# Altium PCB diban_v2.0.PcbDoc
Units mil, origin at the board's own origin, x right, y up, seen from the top; angles counter-clockwise.
Board outline 2755.91 x 2755.91 mil, 2 copper layers (Top Layer, Bottom Layer), stack 21.6 mil thick; 176 components, 148 nets, 694 pads, 0 vias.
Unrouted connection lines stored in the file: 446.
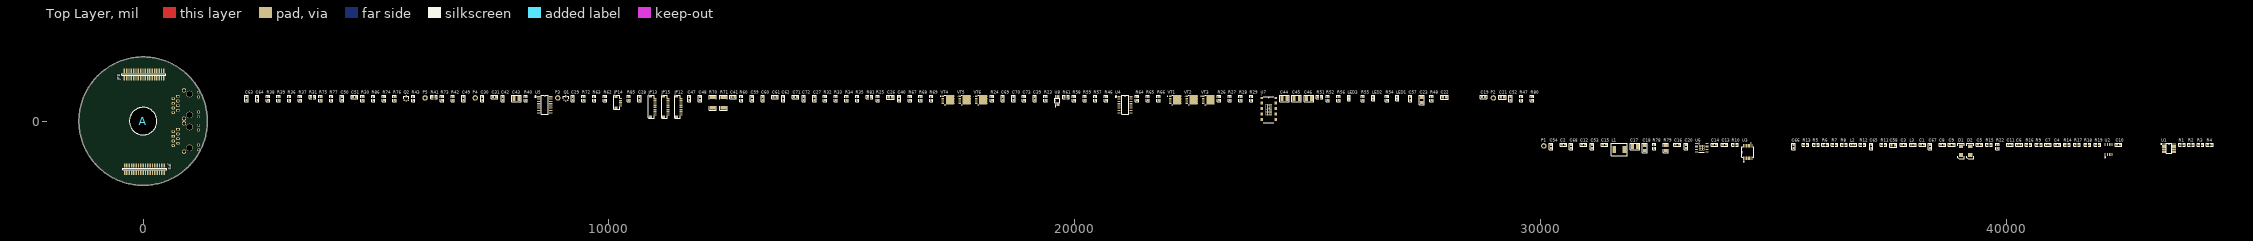
[diagram p0: Top Layer view]
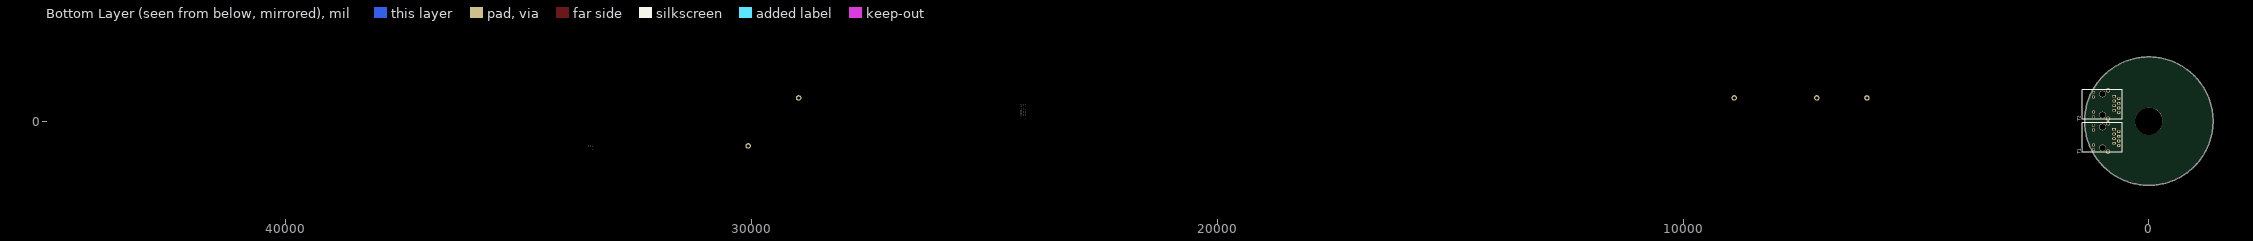
[diagram p1: Bottom Layer view, seen from below]

## Layer stack, top to bottom
Top Solder: solder mask 0.4, Solder Resist, Dk 3.5
Top Layer: signal copper 2.35
Dielectric 1: core 16.9, FR-4, Dk 4.2
Bottom Layer: signal copper 2.35
Bottom Solder: solder mask 0.4, Solder Resist, Dk 3.5

## Board outline
-1377.95,0 ccw(c0,0) 0,-1377.95 ccw(c0,0) 1377.95,0 ccw(c0,0) 0,1377.95 ccw(c0,0)

## Design rules (kind name [scope] priority, off if disabled: settings)
Clearance [All] p1: gap=5
ComponentClearance [All] p1: gap=0 collisioncheckmode=3 verticalgap=10 showdistances=FALSE
DiffPairsRouting [All] p1: maxlimit=10 minlimit=10 mostfreqgap=10 toplayer_minwidth=15 toplayer_maxwidth=15 toplayer_prefwidth=15 bottomlayer_minwidth=15 bottomlayer_maxwidth=15 bottomlayer_prefwidth=15 maxuncoupledlength=500
HoleSize [All] p1: absolutevalues=TRUE maxlimit=600 minlimit=1 maxpercent=80.000 minpercent=20.000
HoleToHoleClearance [All] p1: gap=5 allowstackedmicrovias=TRUE
MinimumSolderMaskSliver [All] p1: minsoldermaskwidth=0
PlaneClearance [All] p1: clearance=10
PlaneConnect [All] p1: planeconnectstyle=Relief reliefexpansion=12 reliefentries=4 reliefconductorwidth=15 reliefairgap=10
PolygonConnect [All] p1: connectstyle=Relief reliefconductorwidth=10 reliefentries=4 polygonreliefangle="90 Angle" airgapwidth=10
RoutingVias [All] p1: holewidth=10 width=20 viastyle="Through Hole" minholewidth=10 minwidth=20 maxholewidth=28 maxwidth=50
SilkToSilkClearance [All] p1: silktosilkclearance=0
SilkToSolderMaskClearance [IsPad] p1: minsilkscreentomaskgap=0 clearancetoexposedcopper=TRUE
SolderMaskExpansion [All] p1: expansion=4
Width [All] p1: maxlimit=50 minlimit=5 preferedwidth=10
21 further rules are at their usual default settings.

## Classes and differential pairs
differential pair RXA: +RXA_P -RXA_N
differential pair RXB: +RXB_P -RXB_N
differential pair TXA: +TXA_P -TXA_N
differential pair TXB: +TXB_P -TXB_N

## Components (designator, comment, footprint, x,y, rotation, side; value= is the part's Value field where it differs from the comment)
A "circle" Circle 0,0 r90 top
C1 "0603B223J6R3NT" CC1608-0603 38199,-508 r0 top
C2 "0603B223J6R3NT" CC1608-0603 30491,-508 r0 top
C3 "0603B103J6R3NT" CC1608-0603 37796,-508 r0 top
C4 "0603B150J6R3NT" CC1608-0603 41100,-508 r0 top
C5 "0603B150J6R3NT" CC1608-0603 39427,-508 r0 top
C6 "0603B150J6R3NT" CC1608-0603 40278,-508 r0 top
C7 "0603B104J6R3NT" CC1608-0603 40899,-508 r0 top
C8 "0603B104J6R3NT" CC1608-0603 38630,-508 r0 top
C9 "0603B104J6R3NT" CC1608-0603 38830,-508 r0 top
C10 "0603B104J6R3NT" CC1608-0603 42413,-508 r0 top
C11 "0603B104J6R3NT" CC1608-0603 40078,-508 r0 top
C12 "0603B104J6R3NT" CC1608-0603 30922,-508 r0 top
C13 "0603B104J6R3NT" CC1608-0603 33954,-508 r0 top
C14 "0603B104J6R3NT" CC1608-0603 33734,-508 r0 top
C15 "0603B104J6R3NT" CC1608-0603 31372,-508 r0 top
C16 "0603B104J6R3NT" CC1608-0603 32938,-508 r0 top
C17 "C3225X7S2A475M200AB" CC3225-1210 32028,-541 r0 top
C18 "C3216X5R2A105K" CC3216-1206 32239,-574 r90 top
C19 "0603B225J6R3NT" CC1608-0603 28781,521 r0 top
C20 "0603B474J6R3NT" CC1608-0603 33123,-544 r90 top
C21 "CL21C360JBANNNC" CC2012-0805 29186,511 r0 top
C22 "GRM21BR61E475KA12L" CC2012-0805 27937,511 r0 top
C23 "GRM31CR61A476KE15L" CC3216-1206 27450,455 r90 top
C26 "0603B225J6R3NT" CC2012-0805 16045,511 r0 top
C27 "0603B223J500NT" CC1608-0603 14412,485 r90 top
C28 "0603B105J250NT" CC1608-0603 10655,485 r90 top
C29 "0603B105J250NT" CC1608-0603 9225,485 r90 top
C30 "0603B222J6R3NT" CC1608-0603 7282,485 r90 top
C31 "0603B222J6R3NT" CC1608-0603 7547,521 r0 top
C39 "0603B104J500NT" CC1608-0603 19144,485 r90 top
C40 "0603B104J500NT" CC1608-0603 16232,485 r90 top
C41 "0603B104J500NT" CC1608-0603 12667,521 r0 top
C42 "0603B104J101NT" CC1608-0603 7722,485 r90 top
C43 "GRM32ER72A225KA35L" CC3225-1210 8019,488 r0 top
C44 "GRM32ER72A225KA35L" CC3225-1210 24505,488 r0 top
C45 "GRM32ER72A225KA35L" CC3225-1210 24767,488 r0 top
C46 "GRM32ER72A225KA35L" CC3225-1210 25029,488 r0 top
C47 "0603B102J500NT" CC1608-0603 11726,485 r90 top
C48 "0603B102J500NT" CC1608-0603 11956,485 r90 top
C49 "0603B104J160NT" CC1608-0603 6876,485 r90 top
C50 "0603B104J160NT" CC1608-0603 4269,485 r90 top
C51 "0603B104J160NT" CC1608-0603 4534,521 r0 top
C52 "0603B104J160NT" CC1608-0603 29359,485 r90 top
C53 "0603B104J101NT" CC1608-0603 31107,-544 r90 top
C54 "0603B103J101NT" CC1608-0603 30226,-544 r90 top
C57 "0603B474J6R3NT" CC1608-0603 27204,485 r90 top
C58 "0805B106J100NT" CC2012-0805 37574,-518 r0 top
C59 "0603B104J6R3NT" CC1608-0603 13072,485 r90 top
C60 "0603B104J6R3NT" CC1608-0603 13302,485 r90 top
C61 "0603B104J6R3NT" CC1608-0603 13567,521 r0 top
C62 "0603B104J6R3NT" CC1608-0603 13742,485 r90 top
C63 "0603B104J6R3NT" CC1608-0603 2219,485 r90 top
C64 "0603B104J6R3NT" CC1608-0603 2449,485 r90 top
C65 "0402B104J6R3NT" CC1608-0603 37101,-544 r90 top
C66 "0402B104J6R3NT" CC1608-0603 35430,-544 r90 top
C67 "0603B223J6R3NT" CC1608-0603 38364,-544 r90 top
C68 "0603B223J6R3NT" CC1608-0603 30656,-544 r90 top
C69 "0603B331J6R3NT" CC1608-0603 18455,485 r90 top
C70 "0603B331J6R3NT" CC1608-0603 18685,485 r90 top
C71 "0603B331J6R3NT" CC1608-0603 14007,521 r0 top
C72 "0603B331J6R3NT" CC1608-0603 14182,485 r90 top
C73 "0603B104J6R3NT" CR1608-0603 18915,486 r90 top
D1 "Diode Schottky" TVS 39030,-732 r90 top
D2 "Diode Schottky" TVS 39228,-732 r90 top
JP8 "Header 18X2" DC_1.27_36 -404,920 r180 top
JP9 "Header 18X2" DC_1.27_36 452,-953 r0 top
JP12 "Header 10" SH1.0T-10A 11551,134 r90 top
JP13 "Header 10" SH1.0T-10A 10991,134 r90 top
JP14 "SH1.0T-5A" SH1.0T-5A 10250,326 r90 top
JP15 "Header 10" SH1.0T-10A 11271,134 r90 top
L1 "SPR6540-150M" SPR6540 31585,-610 r0 top
L2 "BLM18EG221SN1D" BLM0603 36714,-508 r0 top
L3 "BLM18EG221SN1D" BLM0603 37997,-508 r0 top
LED1 "LED Chip" 0603D 26928,468 r90 top
LED2 "LED Chip" 0603D 26409,468 r90 top
LED3 "LED Chip" 0603D 25889,468 r90 top
P1 "PAD" PAD 30073,-532 r0 top
P2 "PAD" PAD 28990,497 r0 top
P3 "PAD" PAD 8903,497 r0 top
P4 "PAD" PAD 7130,497 r0 top
P5 "PAD" PAD 6053,497 r0 top
Q1 "NPN" SOT-23 9036,449 r0 top
Q2 "NPN" SOT-23 5609,449 r0 top
R1 "RC03K49R9JT" CR1608-0603 43771,-508 r0 top
R2 "RC03K49R9JT" CR1608-0603 43971,-508 r0 top
R3 "RC03K49R9JT" CR1608-0603 44170,-508 r0 top
R4 "RC03K49R9JT" CR1608-0603 44370,-508 r0 top
R5 "RC03K49R9JT" CR1608-0603 35915,-508 r0 top
R6 "RC03K49R9JT" CR1608-0603 36115,-508 r0 top
R7 "RC03K49R9JT" CR1608-0603 36315,-508 r0 top
R8 "RC03K49R9JT" CR1608-0603 36514,-508 r0 top
R9 "RC03K331JT" CR1608-0603 40699,-508 r0 top
R10 "RC03K331JT" CR1608-0603 34174,-508 r0 top
R11 "RC03K101JT" CR1608-0603 37366,-508 r0 top
R12 "RC03K101JT" CR1608-0603 36916,-508 r0 top
R13 "RC03K101JT" CR1608-0603 35695,-508 r0 top
R14 "RC03K100JT" CR1608-0603 41301,-508 r0 top
R15 "RC03K100JT" CR1608-0603 39628,-508 r0 top
R16 "RC03K100JT" CR1608-0603 40479,-508 r0 top
R17 "RC03K492JT" CR1608-0603 41521,-508 r0 top
R18 "RC03K492JT" CR1608-0603 41741,-508 r0 top
R19 "RC03K492JT" CR1608-0603 41961,-508 r0 top
R22 "RC03K121JT" CR1608-0603 39812,-543 r90 top
R23 "RC03K492JT" CR1608-0603 19374,486 r90 top
R24 "RC03K492JT" CR1608-0603 18225,486 r90 top
R25 "RC03K492JT" CR1608-0603 15772,486 r90 top
R26 "RC03K492JT" CR1608-0603 23101,486 r90 top
R27 "RC03K492JT" CR1608-0603 23331,486 r90 top
R28 "RC03K492JT" CR1608-0603 23561,486 r90 top
R29 "RC03K492JT" CR1608-0603 23791,486 r90 top
R30 "RC03K492JT" CR1608-0603 4709,486 r90 top
R31 "RC03K492JT" CR1608-0603 3634,521 r0 top
R32 "RC03K501JT" CR1608-0603 14642,486 r90 top
R33 "RC03K501JT" CR1608-0603 14872,486 r90 top
R34 "RC03K501JT" CR1608-0603 15102,486 r90 top
R35 "RC03K501JT" CR1608-0603 15332,486 r90 top
R36 "RC03K501JT" CR1608-0603 3139,486 r90 top
R37 "RC03K501JT" CR1608-0603 3368,486 r90 top
R38 "RC03K492JT" CR1608-0603 2679,486 r90 top
R39 "RC03K492JT" CR1608-0603 2909,486 r90 top
R40 "RC03K492JT" CR1608-0603 8215,486 r90 top
R41 "RC03K492JT" CR1608-0603 6241,521 r0 top
R42 "RC03K492JT" CR1608-0603 6646,486 r90 top
R43 "RC03K492JT" CR1608-0603 5799,486 r90 top
R46 "RC03K492JT" CR1608-0603 20674,486 r90 top
R47 "RC03K105JT" CR1608-0603 29589,486 r90 top
R48 "RC03K2553JT" CR1608-0603 27664,486 r90 top
R51 "RC03K103JT" CR1608-0603 25260,521 r0 top
R52 "RC03K103JT" CR1608-0603 25435,486 r90 top
R54 "RC03K331JT" CR1608-0603 26705,486 r90 top
R55 "RC03K331JT" CR1608-0603 26185,486 r90 top
R56 "RC03K331JT" CR1608-0603 25665,486 r90 top
R57 "RC03K121JT" CR1608-0603 20444,486 r90 top
R58 "RC03K103JT" CR1608-0603 19985,486 r90 top
R59 "RC03K103JT" CR1608-0603 20215,486 r90 top
R60 "RC03K102JT" CR1608-0603 12842,486 r90 top
R61 "RC03K101JT" CR1608-0603 19810,521 r0 top
R62 "RC03K560JT" CR1608-0603 9915,486 r90 top
R63 "RC03K560JT" CR1608-0603 9685,486 r90 top
R64 "RC03K100JT" CR1608-0603 21338,486 r90 top
R65 "RC03K100JT" CR1608-0603 21568,486 r90 top
R66 "RC03K100JT" CR1608-0603 21798,486 r90 top
R67 "RC03K100JT" CR1608-0603 16462,486 r90 top
R68 "RC03K100JT" CR1608-0603 16692,486 r90 top
R69 "RC03K100JT" CR1608-0603 16922,486 r90 top
R70 "CRA2512-FZ-R010ELF" CR6332-2512 12229,395 r90 top
R71 "CRA2512-FZ-R010ELF" CR6332-2512 12459,395 r90 top
R72 "RC03K8452JT" CR1608-0603 9455,486 r90 top
R73 "RC03K4991JT" CR1608-0603 6416,486 r90 top
R74 "RC03K8452JT" CR1608-0603 5169,486 r90 top
R75 "RC03K4991JT" CR1608-0603 3809,486 r90 top
R76 "RC03K8452JT" CR1608-0603 5399,486 r90 top
R77 "RC03K4991JT" CR1608-0603 4039,486 r90 top
R78 "RC03K8452JT" CR1608-0603 32443,-543 r90 top
R79 "CRCW12063R30JNEA" CR3216-1206 32689,-575 r90 top
R80 "RC03K4991JT" CR1608-0603 29819,486 r90 top
R81 "RC03K103JT" CR1608-0603 15597,521 r0 top
R85 "RC03K501JT" CR1608-0603 10425,486 r90 top
R86 "RC03K501JT" CR1608-0603 4939,486 r90 top
T1 "HR911102_RJ45" RJ45 647,-326 r90 bottom
T2 "HR911102_RJ45" RJ45 646,382 r90 bottom
U1 "DS90LV032A" DS90LV032A 43386,-494 r0 top
U2 "TCAN322" TCAN332 42123,-716 r90 top
U3 "MAX3227E_DB_16" MAX3227E 34451,-664 r90 top
U4 "PS2805C-4" PS2805C_4 20953,524 r0 top
U5 "PS2805C-4" PS2805C_4 8494,524 r0 top
U6 "LM46002PWPR" IM46002 33461,-571 r0 top
U7 "DRV8301" DRV8301 24165,241 r0 top
U8 "SN65HVD73" SN65HVD73 19586,355 r0 top
VT1 "CSD18540" "CSD18540 - duplicate" 22156,457 r0 top
VT2 "CSD18540" "CSD18540 - duplicate" 22514,457 r0 top
VT3 "CSD18540" "CSD18540 - duplicate" 22871,457 r0 top
VT4 "CSD18540" "CSD18540 - duplicate" 17280,457 r0 top
VT5 "CSD18540" "CSD18540 - duplicate" 17638,457 r0 top
VT6 "CSD18540" "CSD18540 - duplicate" 17995,457 r0 top

## Footprints (in the part's own frame and the unit in brackets; to place one, negate y for a bottom-side part, rotate by r counter-clockwise, add the part's x,y. Pads: shape width x height; smd on the part's side, far side on the other; paste and mask are expansions set on the pad)
0603D [mil]
  rect 40x40 smd: 1(0,0) 2(60,0)
  silkscreen extent -30,-30 90,30
BLM0603 [mm]
  rect 1.1x1 smd: 1(-0.85,0) 2(0.85,0)
  silkscreen extent -1.8,-0.9 1.86,0.9
CC1608-0603 [mm]
  rect 1.1x1 smd: 1(-0.85,0) 2(0.85,0)
  silkscreen extent -1.8,-0.9 1.83,0.9
CC2012-0805 [mm]
  rect 1.3x1.5 smd: 1(-0.95,0) 2(0.95,0)
  silkscreen extent -2,-1.15 2.03,1.15
CC3216-1206 [mm]
  rect 1.6x1.8 smd: 1(-1.4,0) 2(1.4,0)
  silkscreen extent -2.6,-1.3 2.59,1.3
CC3225-1210 [mm]
  rect 1.6x2.7 smd: 1(-1.4,0) 2(1.4,0)
  silkscreen extent -2.6,-1.75 2.59,1.75
Circle [mm]
  round 15 hole 15: 0(0,0)
  silkscreen extent -7.5,-7.5 7.5,7.5
CR1608-0603 [mm]
  rect 1.1x1 smd: 1(-0.85,0) 2(0.85,0)
  silkscreen extent -1.8,-0.9 1.8,0.9
CR3216-1206 [mm]
  rect 1.6x1.8 smd: 1(-1.4,0) 2(1.4,0)
  silkscreen extent -2.6,-1.3 2.6,1.3
CR6332-2512 [mm]
  rect 1.8x3.2 smd: 1(-2.8,0) 2(2.8,0)
  silkscreen extent -4.1,-2 4.1,2
"CSD18540 - duplicate" [mm]
  rect 1.372x0.71 smd paste-0.673: 1(-2.77,-0.635) 1(-2.77,0.635) 1(-2.77,1.905) 4(-2.77,-1.905) 5(2.77,-1.905) 5(2.77,-0.635) 5(2.77,0.635) 5(2.77,1.905)
  rect 4.343x5.08 smd: 5(1.041,-0.025)
  silkscreen extent -4.17,-2.55 -1.25,2.55
DC_1.27_36 [mm]
  rect 0.74x2.4 smd: 1(0,0) 2(0,-4.013) 3(-1.27,0) 4(-1.27,-4.013) 5(-2.54,0) 6(-2.54,-4.013) 7(-3.81,0) 8(-3.81,-4.013) 9(-5.08,0) 10(-5.08,-4.013) 11(-6.35,0) 12(-6.35,-4.013) 13(-7.62,0) 14(-7.62,-4.013) 15(-8.89,0) 16(-8.89,-4.013) 17(-10.16,0) 18(-10.16,-4.013) 19(-11.43,0) 20(-11.43,-4.013) 21(-12.7,0) 22(-12.7,-4.013) 23(-13.97,0) 24(-13.97,-4.013) 25(-15.24,0) 26(-15.24,-4.013) 27(-16.51,0) 28(-16.51,-4.013) 29(-17.78,0) 30(-17.78,-4.013) 31(-19.05,0) 32(-19.05,-4.013) 33(-20.32,0) 34(-20.32,-4.013) 35(-21.59,0) 36(-21.59,-4.013)
  silkscreen extent -22.71,-2.41 1.27,-1.52
DRV8301 [mil]
  rect 54x12 smd: 1(-152.5,265.75) 2(-152.5,246.06) 3(-152.5,226.38) 4(-152.5,206.69) 5(-152.5,187.01) 6(-152.5,167.32) 7(-152.5,147.64) 8(-152.5,127.95) 9(-152.5,108.27) 10(-152.5,88.58) 11(-152.5,68.9) 12(-152.5,49.21) 13(-152.5,29.53) 14(-152.5,9.84) 15(-152.5,-9.84) 16(-152.5,-29.53) 17(-152.5,-49.21) 18(-152.5,-68.9) 19(-152.5,-88.58) 20(-152.5,-108.27) 21(-152.5,-127.95) 22(-152.5,-147.64) 23(-152.5,-167.32) 24(-152.5,-187.01) 25(-152.5,-206.69) 26(-152.5,-226.38) 27(-152.5,-246.06) 28(-152.5,-265.75) 29(152.5,-265.75) 30(152.5,-246.06) 31(152.5,-226.38) 32(152.5,-206.69) 33(152.5,-187.01) 34(152.5,-167.32) 35(152.5,-147.64) 36(152.5,-127.95) 37(152.5,-108.27) 38(152.5,-88.58) 39(152.5,-68.9) 40(152.5,-49.21) 41(152.5,-29.53) 42(152.5,-9.84) 43(152.5,9.84) 44(152.5,29.53) 45(152.5,49.21) 46(152.5,68.9) 47(152.5,88.58) 48(152.5,108.27) 49(152.5,127.95) 50(152.5,147.64) 51(152.5,167.32) 52(152.5,187.01) 53(152.5,206.69) 54(152.5,226.38) 55(152.5,246.06) 56(152.5,265.75)
  round 20 / inner round 60 / far side round 20 hole 10: 57(-46.5,-108.5) 57(-46.5,-77.5) 57(-46.5,-46.5) 57(-46.5,-15.5) 57(-46.5,15.5) 57(-46.5,46.5) 57(-46.5,77.5) 57(-46.5,108.5) 57(1,-109) 57(1,-78) 57(1,-47) 57(1,-16) 57(1,15) 57(1,46) 57(1,77) 57(1,108) 57(46.5,-108.5) 57(46.5,-77.5) 57(46.5,-46.5) 57(46.5,-15.5) 57(46.5,15.5) 57(46.5,46.5) 57(46.5,77.5) 57(46.5,108.5)
  rect 142.13x250 smd mask-124.5: 57(0,0)
  silkscreen extent -114,-278 114,278
DS90LV032A [mm]
  rect 2x0.5 smd: 1(0,0) 2(0,-0.65) 3(0,-1.3) 4(0,-1.95) 5(0,-2.6) 6(0,-3.25) 7(0,-3.9) 8(0,-4.55) 9(5.5,-4.55) 10(5.5,-3.9) 11(5.5,-3.25) 12(5.5,-2.6) 13(5.5,-1.95) 14(5.5,-1.3) 15(5.5,-0.65) 16(5.5,0)
  silkscreen extent -1.63,-5.11 4.17,0.56
IM46002 [mm]
  oval 1.65x0.35 smd paste-0.102 mask+0.051: 1(-2.875,2.275) 2(-2.875,1.625) 3(-2.875,0.975) 4(-2.875,0.325) 5(-2.875,-0.325) 6(-2.875,-0.975) 7(-2.875,-1.625) 8(-2.875,-2.275) 9(2.875,-2.275) 10(2.875,-1.625) 11(2.875,-0.975) 12(2.875,-0.325) 13(2.875,0.325) 14(2.875,0.975) 15(2.875,1.625) 16(2.875,2.275)
  round 0.4 / inner round 1.524 / far side round 0.4 hole 0.2 mask+0.051: 17(-1,-1) 17(-1,0) 17(-1,1) 17(0,-1) 17(0,0) 17(0,1) 17(1,-1) 17(1,0) 17(1,1)
  rect 3x3.1 smd paste-0.102 mask+0.051: 17(0,0)
  silkscreen extent -1.7,-2.55 1.5,2.47
MAX3227E [mil]
  rect 81x17 smd: 1(-135,89.57) 2(-135,63.98) 3(-135,38.39) 4(-135,12.8) 5(-135,-12.8) 6(-135,-38.39) 7(-135,-63.98) 8(-135,-89.57) 9(135,-89.57) 10(135,-63.98) 11(135,-38.39) 12(135,-12.8) 13(135,12.8) 14(135,38.39) 15(135,63.98) 16(135,89.57)
  silkscreen extent -213,-128 196,128
PAD [mm]
  round 3 hole 1.8: 1(0,0)
PS2805C_4 [mm]
  rect 1.8x0.6 smd: 1(0,0) 2(0,-1.27) 3(0,-2.54) 4(0,-3.81) 5(0,-5.08) 6(0,-6.25) 7(0,-7.52) 8(0,-8.79) 9(6.5,-8.79) 10(6.5,-7.52) 11(6.5,-6.25) 12(6.5,-5.08) 13(6.5,-3.81) 14(6.5,-2.54) 15(6.5,-1.27) 16(6.5,0)
  silkscreen extent -2.12,-9.58 5.18,0.79
RJ45 [mm]
  round 3.6 hole 3.4: 0(-6.335,8.89) 0(5.075,8.89)
  rect 1.524x2.032 hole 1.016: 1(3.81,2.54)
  oval 1.524x2.032 hole 1.016: 2(2.54,0) 3(1.27,2.54) 4(0,0) 5(-1.27,2.54) 6(-2.54,0) 7(-3.81,2.54) 8(-5.08,0)
  round 1.6 hole 1.2: 9(5.985,13.79) 10(3.445,13.79) 11(-4.725,13.79) 12(-7.265,13.79)
  round 2.286 hole 1.651: 13(-8.385,5.84) 14(7.105,5.84)
  silkscreen extent -8.64,-2 7.36,19.81
SH1.0T-5A [mm]
  rect 1.2x1.8 smd: 0(-1,2.525) 0(5,2.525)
  rect 0.6x1.55 smd: 1(0,0) 2(1,0) 3(2,0) 4(3,0) 5(4,0)
  silkscreen extent -1.85,0.43 5.87,3.58
SH1.0T-10A [mm]
  rect 1.2x1.8 smd: 0(-1,2.525) 0(10,2.525)
  rect 0.6x1.55 smd: 1(0,0) 2(1,0) 3(2,0) 4(3,0) 5(4,0) 6(5,0) 7(6,0) 8(7,0) 9(8,0) 10(9,0)
  silkscreen extent -1.7,0.38 10.74,3.58
SN65HVD73 [mm]
  rect 0.3x1.45 smd: 1(0,0) 2(0.5,0) 3(1,0) 4(1.5,0) 5(2,0) 6(2,4.4) 7(1.5,4.4) 8(1,4.4) 9(0.5,4.4) 10(0,4.4)
  silkscreen extent -0.48,-1.12 2.41,3.51
SOT-23 [mil]
  rect 28x36 smd: 1(0,0) 2(80,0)
  rect 28x45 smd: 3(40,85)
  silkscreen extent -18,-10 98,80
SPR6540 [mm]
  rect 2x3.6 smd: 1(0,0) 2(5.55,0)
  silkscreen extent -1.63,-3.5 7.16,3.5
TCAN332 [mm]
  rect 1.55x0.6 smd: 1(0,0) 2(0,-1.27) 3(0,-2.54) 4(0,-3.81) 5(5.4,-3.81) 6(5.4,-2.54) 7(5.4,-1.27) 8(5.4,0)
  silkscreen extent -1.78,-0.25 -1.27,0.25
TVS [mm]
  rect 2.16x2.26 smd: 1(0,0) 2(4.9,0)
  silkscreen extent -2.03,-1.78 6.6,1.78

## Part data
C1 C2 C3 C4 C5 C6 C7 C8 C9 C10 C11 C12 C13 C14 C15 C16 C17 C18 C19 C20 C21 C22 C23 C26 C27 C28 C29 C30 C31 C39 C40 C41 C42 C43 C44 C45 C46 C47 C48 C49 C50 C51 C52 C53 C54 C57 C58 C59 C60 C61 C62 C63 C64 C65 C66 C67 C68 C69 C70 C71 C72 C73: library part CAP
D1 D2: "Schottky Diode"
JP8 JP9: "Header,36-Pin, Dual row"
JP12 JP13 JP15: "Header, 10-Pin"
L1: library part "Inductor Chip", "Inductor"
L2 L3: library part "Inductor Iron", "Magnetic-Core Inductor"
LED1 LED2 LED3: "Typical Chip LED"
Q1 Q2: "NPN Bipolar Transistor"
R1 R2 R3 R4 R5 R6 R7 R8 R9 R10 R11 R12 R13 R14 R15 R16 R17 R18 R19 R22 R23 R24 R25 R26 R27 R28 R29 R30 R31 R32 R33 R34 R35 R36 R37 R38 R39 R40 R41 R42 R43 R46 R47 R48 R51 R52 R54 R55 R56 R57 R58 R59 R60 R61 R62 R63 R64 R65 R66 R67 R68 R69 R70 R71 R72 R73 R74 R75 R76 R77 R78 R79 R80 R81 R85 R86: library part Resistor
U3 U6: "Imported"
U4 U5: "Optoisolator"

## Nets (pads, with @x,y where several pads share a name; then routed paths per layer and width w, separated by ;. In a path a pad name is that pad's centre, name@x,y a point inside that pad or via, vN(x,y) a via of type N, cw(c..) or ccw(c..) an arc to the next point about the centre after c; other vN are vias at no path point)
3V3: C3.2 C8.2 C9.2 C14.2 C58.2 C73.1 JP8.1 JP8.3 JP8.5 L2.1 L3.1 R17.1 R18.1 R19.1 R26.2 R27.2 R28.2 R29.2 R38.1 R39.1 R40.2 R41.2 R51.2 R52.2 R58.1 R59.1 U1.4 U1.16 U2.3 U3.12 U3.15 U3.16 U7.24 U7.49 U8.10
5V0: C21.2 C22.2 C23.2 JP8.2 JP8.4 JP8.6 JP13.4 JP15.7 L1.2 R47.1 U6.5
48V: C17.1 C18.1 C42.2 C43.2 C44.1 C45.1 C46.1 C53.2 P1.1 R78.2 R79.2 U6.12 U6.13 U6.14 U7.29 VT1.5 VT2.5 VT3.5
232_RXD: JP14.5 U3.8
232_TXD: JP14.4 U3.13
/RE: JP9.28 R59.2 U8.2
BISSC_CLK: JP9.25 JP15.6 U8.4
BISSC_DIN: JP9.30 JP15.5 R58.2 U8.1
C+: C71.2 JP15.4 U8.6
C-: C72.2 JP15.3 U8.7
CAN_RX: C11.2 D2.2 JP14.2 R22.1 U2.6
CAN_TX: C10.1 D1.2 JP14.1 R22.2 U2.7
CANRX_MCU: JP8.9 U2.4
CANTX_MCU: C7.2 JP8.7 U2.1
CAP1: JP9.22 JP13.2 R18.2
CAP2: JP9.20 JP13.3 R17.2
CAP3: JP9.24 JP13.1 R19.2
CHIP_MODE0: JP8.25 R9.1
CHIP_MODE1: JP8.23 R10.1
D+: C69.2 JP15.1 R57.2 U8.9
D-: C70.2 JP15.2 R57.1 U8.8
DC_CAL: JP8.19 U7.12
DC_V_FB: C52.2 JP9.35 R78.1 R80.2
DE: JP9.26 R81.1 U8.3
DIGIN1: JP9.23 R29.1 U4.10
DIGIN2: JP9.21 R28.1 U4.12
DIGIN3: JP9.19 R27.1 U4.14
DIGIN4: JP9.17 R26.1 U4.16
DIGIN5: JP9.15 R39.2 U5.10
DIGIN6: JP9.13 R38.2 U5.12
DIGOUT1: JP9.11 R43.2
DIGOUT2: JP9.9 R42.2
EN_GATE: JP8.8 R60.2 U7.16
ENCODER_-A: JP13.10 R11.1 U1.1
ENCODER_-B: JP13.5 R12.1 U1.7
ENCODER_-Z: JP13.7 R13.1 U1.14
ENCODER_A: JP13.9 R11.2 U1.2
ENCODER_B: JP13.6 R12.2 U1.6
ENCODER_Z: JP13.8 R13.2 U1.15
F+: JP9.34 JP15.9
F-: JP9.36 JP15.10
GH_A: R64.2 U7.47
GH_B: R65.2 U7.42
GH_C: R66.2 U7.37
GL_A: R67.2 U7.45
GL_B: R68.2 U7.40
GL_C: R69.2 U7.35
GND: C1.1 C2.1 C3.1 C4.2 C5.1 C6.1 C7.1 C8.1 C9.1 C10.2 C11.1 C12.2 C14.1 C15.1 C17.2 C18.2 C19.2 C22.1 C23.1 C26.1 C28.1 C29.1 C30.1 C31.1 C42.1 C43.1 C44.2 C45.2 C46.2 C47.2 C48.2 C49.1 C50.1 C51.1 C52.1 C53.1 C54.1 C57.1 C58.1 C65.1 C66.1 C67.1 C68.1 C69.1 C70.1 C71.1 C72.1 C73.2 D1.1 D2.1 JP8.27 JP8.28 JP9.1 JP9.2 JP9.3 JP9.4 JP12.7 JP12.8 JP14.3 JP15.8 P2.1 R48.2 R54.1 R55.1 R56.1 R60.1 R61.1 R70.1 R71.1 R73.1 R75.1 R77.1 R80.1 R81.2 T1.4 T1.5 T1.10 T2.4 T2.5 T2.10 U1.8 U1.12 U2.2 U3.14 U4.9 U4.11 U4.13 U4.15 U5.2 U5.4 U5.9 U5.11 U6.6 U6.10 U6.15 U6.16 U6.17 U7.28 U7.31 U7.33 U7.34 U7.57 U8.5 VT6.1
GND1: C59.1 C60.1 C61.1 C62.1 C63.1 C64.1 R32.2 R33.2 R34.2 R35.2 R36.2 R37.2 U4.2 U4.4 U4.6 U4.8 U5.6 U5.8
GND2: Q1.2 Q2.2 R85.1 R86.2
IA: C31.2 JP9.27 R62.1
IB: C30.2 JP9.29 R63.1
INH_A: JP8.18 U7.17
INH_B: JP8.15 U7.19
INH_C: JP8.14 U7.21
INL_A: JP8.16 U7.18
INL_B: JP8.13 U7.20
INL_C: JP8.12 U7.22
INPUT1: C62.2 JP12.1 R25.2
INPUT2: C61.2 JP12.2 R24.2
INPUT3: C60.2 JP12.3 R23.2
INPUT4: C59.2 JP12.4 R46.2
INPUT5: C64.2 JP12.5 R31.2
INPUT6: C63.2 JP12.6 R30.2
LED1: JP9.7 LED1.1
LED2: JP9.18 LED2.1
LED3: JP9.16 LED3.1
NetC12_1: C12.1 U3.7
NetC13_1: C13.1 U3.2
NetC13_2: C13.2 U3.4
NetC15_2: C15.2 U3.3
NetC16_1: C16.1 U3.5
NetC16_2: C16.2 U3.6
NetC19_1: C19.1 U6.4
NetC20_1: C20.1 U6.3
NetC20_2: C20.2 L1.1 U6.1 U6.2
NetC21_1: C21.1 R47.2 R48.1 U6.9
NetC26_2: C26.2 U7.13
NetC27_1: C27.1 U7.15
NetC27_2: C27.2 U7.14
NetC28_2: C28.2 U7.23
NetC29_2: C29.2 U7.27
NetC39_1: C39.1 U7.48
NetC40_1: C40.1 U7.43
NetC41_1: C41.1 U7.38
NetC54_2: C54.2 R79.1
NetC57_2: C57.2 U6.11
NetLED1_2: LED1.2 R54.2
NetLED2_2: LED2.2 R55.2
NetLED3_2: LED3.2 R56.2
NetQ1_1: Q1.1 R85.2 U5.15
NetQ2_1: Q2.1 R86.1 U5.13
NetR9_2: R9.2 T1.9
NetR10_2: R10.2 T2.9
NetR14_2: R14.2 U1.3
NetR15_2: R15.2 U1.13
NetR16_2: R16.2 U1.5
NetR23_1: R23.1 R33.1 U4.3
NetR24_1: R24.1 R34.1 U4.5
NetR25_1: R25.1 R35.1 U4.7
NetR30_1: R30.1 R36.1 U5.5
NetR31_1: R31.1 R37.1 U5.7
NetR32_1: R32.1 R46.1 U4.1
NetR40_1: R40.1 U5.16
NetR41_1: R41.1 U5.14
NetR42_1: R42.1 U5.1
NetR43_1: R43.1 U5.3
NetR61_2: R61.2 U7.7
NetR62_2: R62.2 U7.25
NetR63_2: R63.2 U7.26
NetR64_1: R64.1 VT1.4
NetR65_1: R65.1 VT2.4
NetR66_1: R66.1 VT3.4
NetR67_1: R67.1 VT4.4
NetR68_1: R68.1 VT5.4
NetR69_1: R69.1 VT6.4
NFAULT: JP8.20 R51.1 U7.6
NOCTW: JP8.17 R52.1 U7.5
OUTPUT1: JP12.10 Q1.3
OUTPUT2: JP12.9 Q2.3
QEP1A: C4.1 JP9.10 R14.1
QEP1B: C6.2 JP9.8 R16.1
QEP1I: C5.2 JP9.14 R15.1
QEP1S: JP9.12
RXA_N: JP8.33 R4.1 T1.8
RXA_P: JP8.35 R3.1 T1.7
RXB_N: JP8.34 R8.1 T2.8
RXB_P: JP8.36 R7.1 T2.7
S1_N: C47.1 R70.2 U7.32 U7.44 VT4.1
S2_N: C48.1 R71.2 U7.30 U7.39 VT5.1
SCI_RXD: JP8.10 U3.9
SCI_TXD: JP8.11 U3.11
SH_A: C39.2 P3.1 R72.1 U7.46 VT1.1 VT4.5
SH_B: C40.2 P4.1 R74.1 U7.41 VT2.1 VT5.5
SH_C: C41.2 P5.1 R76.1 U7.36 VT3.1 VT6.5
SPIA_CLK: JP8.24 U7.11
SPIA_CS: JP8.21 U7.8
SPIA_SIMO: JP8.22 U7.9
SPIA_SOMI: JP8.26 U7.10
TXA_N: JP8.29 R2.1 T1.2
TXA_P: JP8.31 R1.1 T1.1
TXB_N: JP8.30 R6.1 T2.2
TXB_P: JP8.32 R5.1 T2.1
VA: C49.2 JP9.32 R72.2 R73.2
VB: C50.2 JP9.31 R74.2 R75.2
VC: C51.2 JP9.33 R76.2 R77.2
VDD33TXRX1: C1.2 C65.2 C67.2 L3.2 R1.2 R2.2 R3.2 R4.2 T1.3 T1.6
VDD33TXRX2: C2.2 C66.2 C68.2 L2.2 R5.2 R6.2 R7.2 R8.2 T2.3 T2.6
pads on no net: A.0 JP9.5 JP9.6 JP12.0 JP13.0 JP14.0 JP15.0 T1.0 T1.11 T1.12 T1.13 T1.14 T2.0 T2.11 T2.12 T2.13 T2.14 U1.9 U1.10 U1.11 U2.5 U2.8 U3.1 U3.10 U6.7 U6.8 U7.1 U7.2 U7.3 U7.4 U7.50 U7.51 U7.52 U7.53 U7.54 U7.55 U7.56

## Silkscreen, mask and mechanical layers (free items; w line width, h text height)
Mechanical 1:
  circle w10: c0,0 r1377.95

## Text inside footprints (layer, text, board x,y; h text height)
U7: Top Overlay "*" at 23994.5,518.75 h40